# Altium PCB PCB1.PcbDoc
Units mm, origin at the board's own origin, x right, y up, seen from the top; angles counter-clockwise.
Board outline 38.5 x 32.5 mm, 4 copper layers (L1(SIGNAL), L2(GND), L3(GND), L4(SIGNAL)), stack 1.57 mm thick; 35 components, 27 nets, 172 pads, 68 vias.
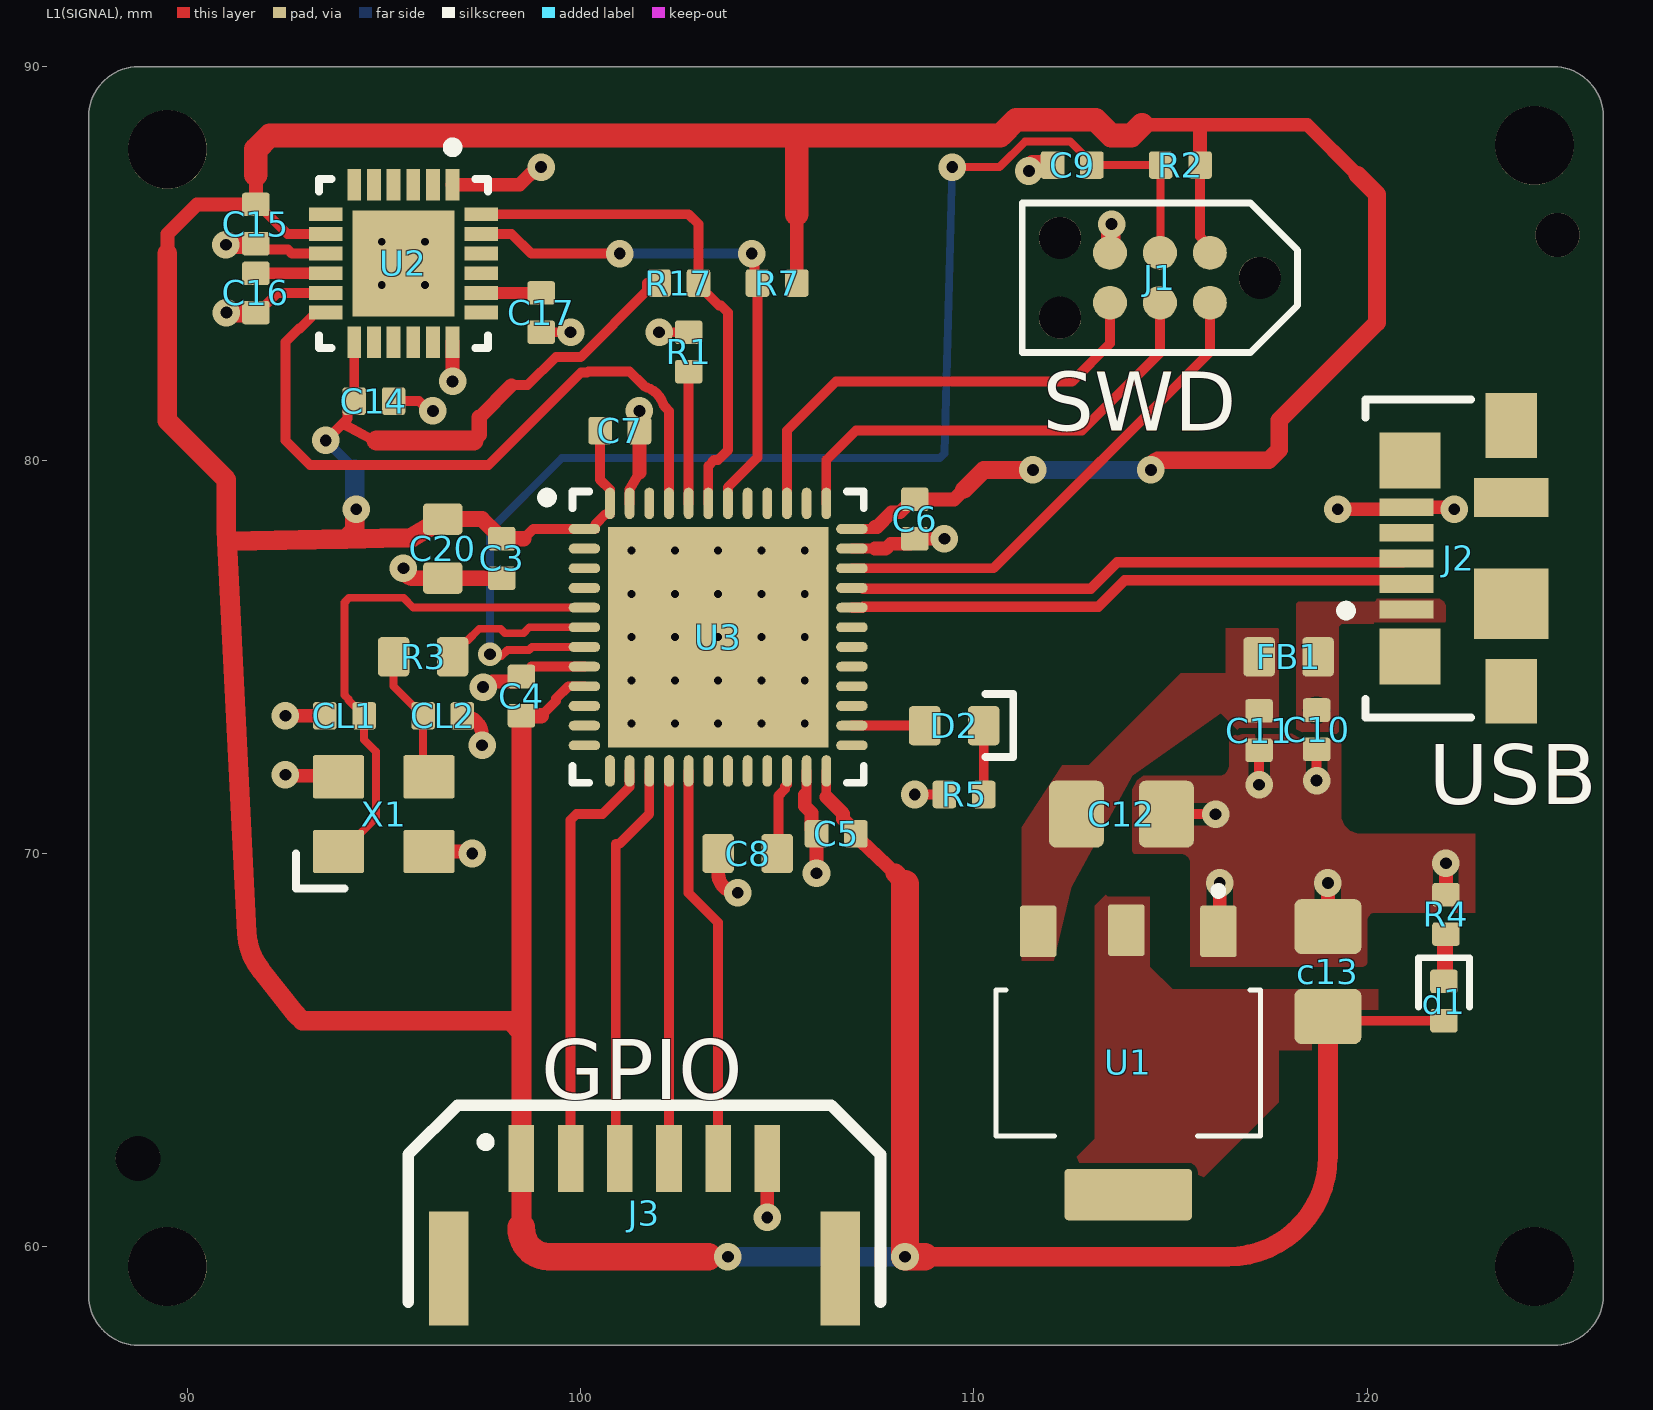
[diagram p0: L1(SIGNAL) view]
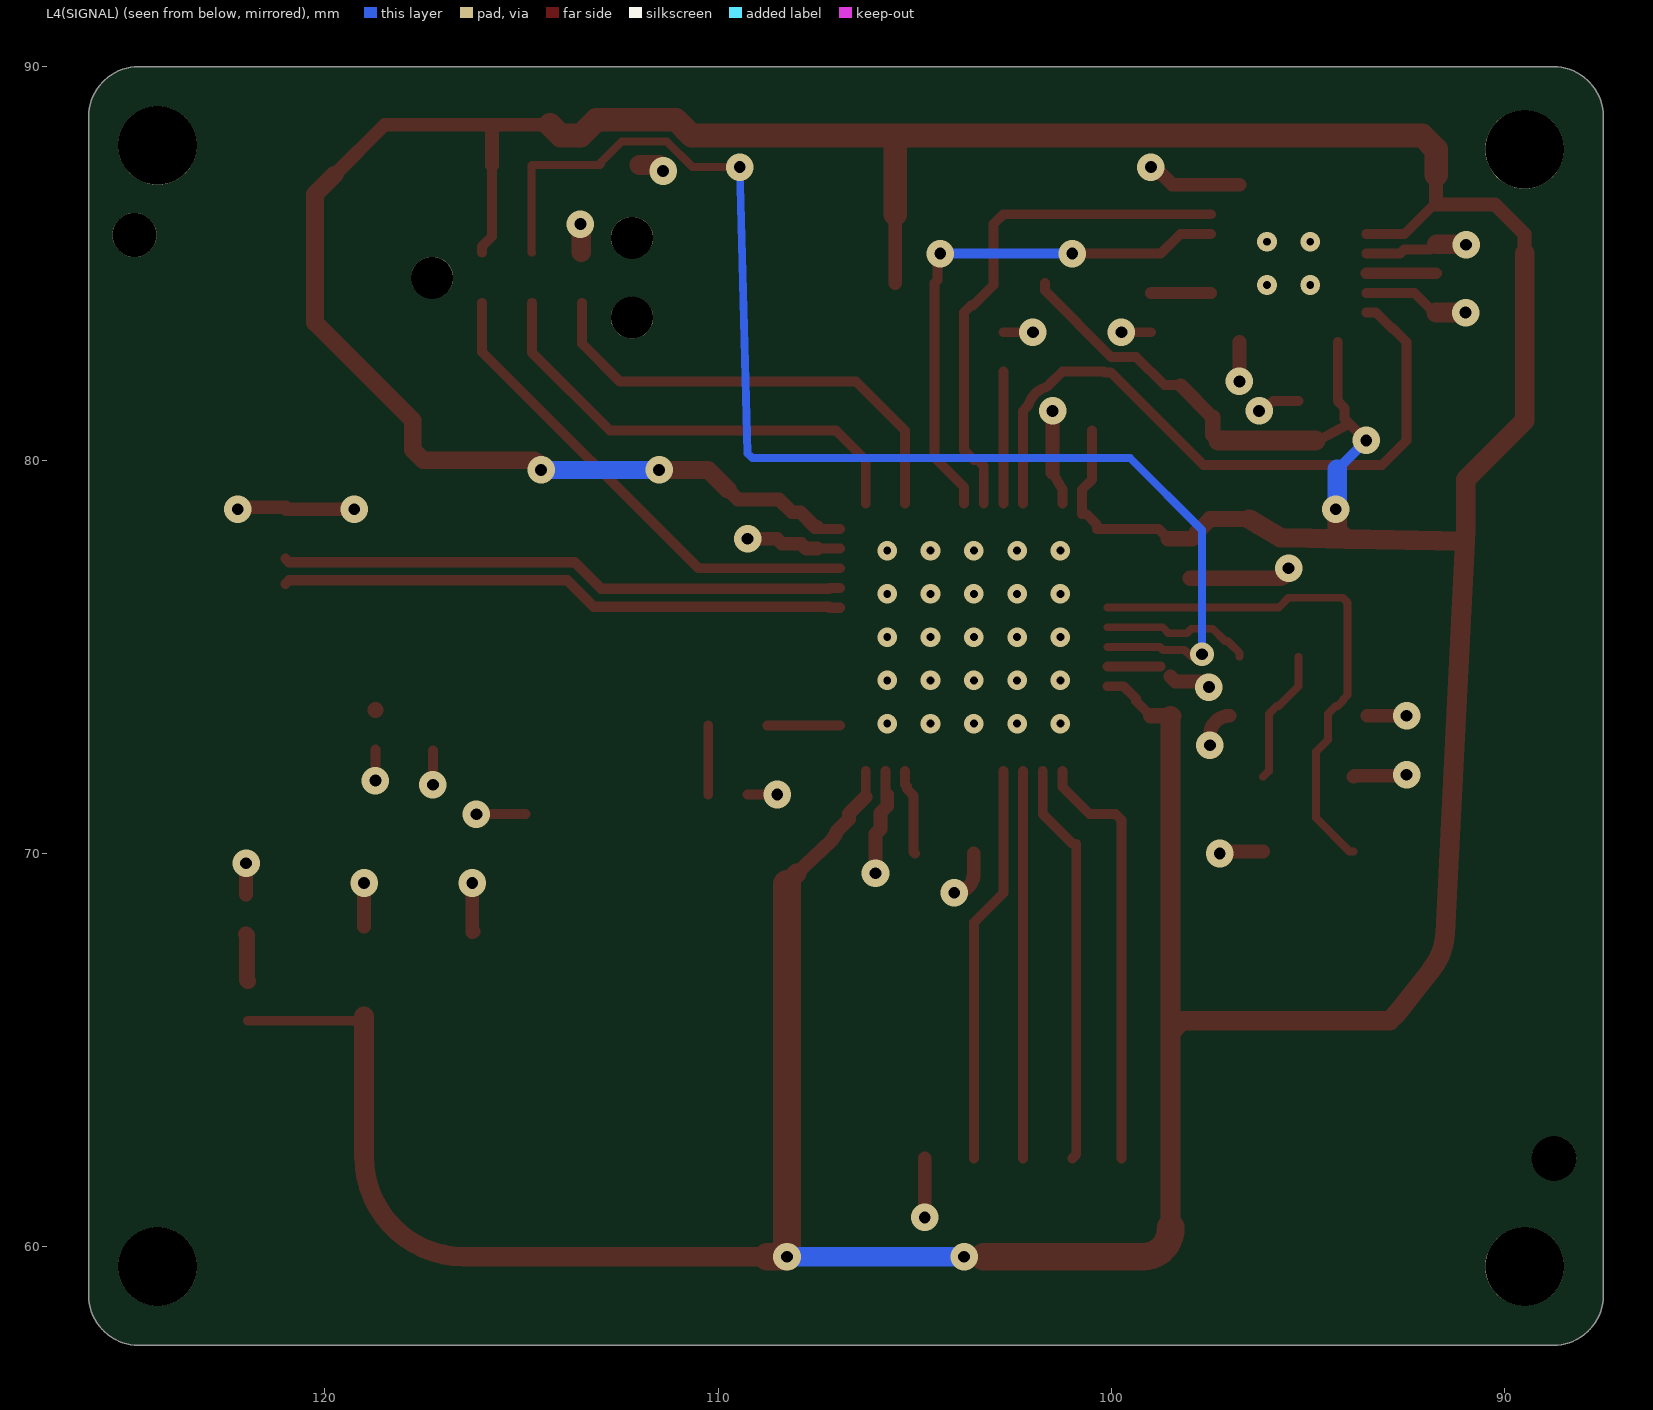
[diagram p1: L4(SIGNAL) view, seen from below]
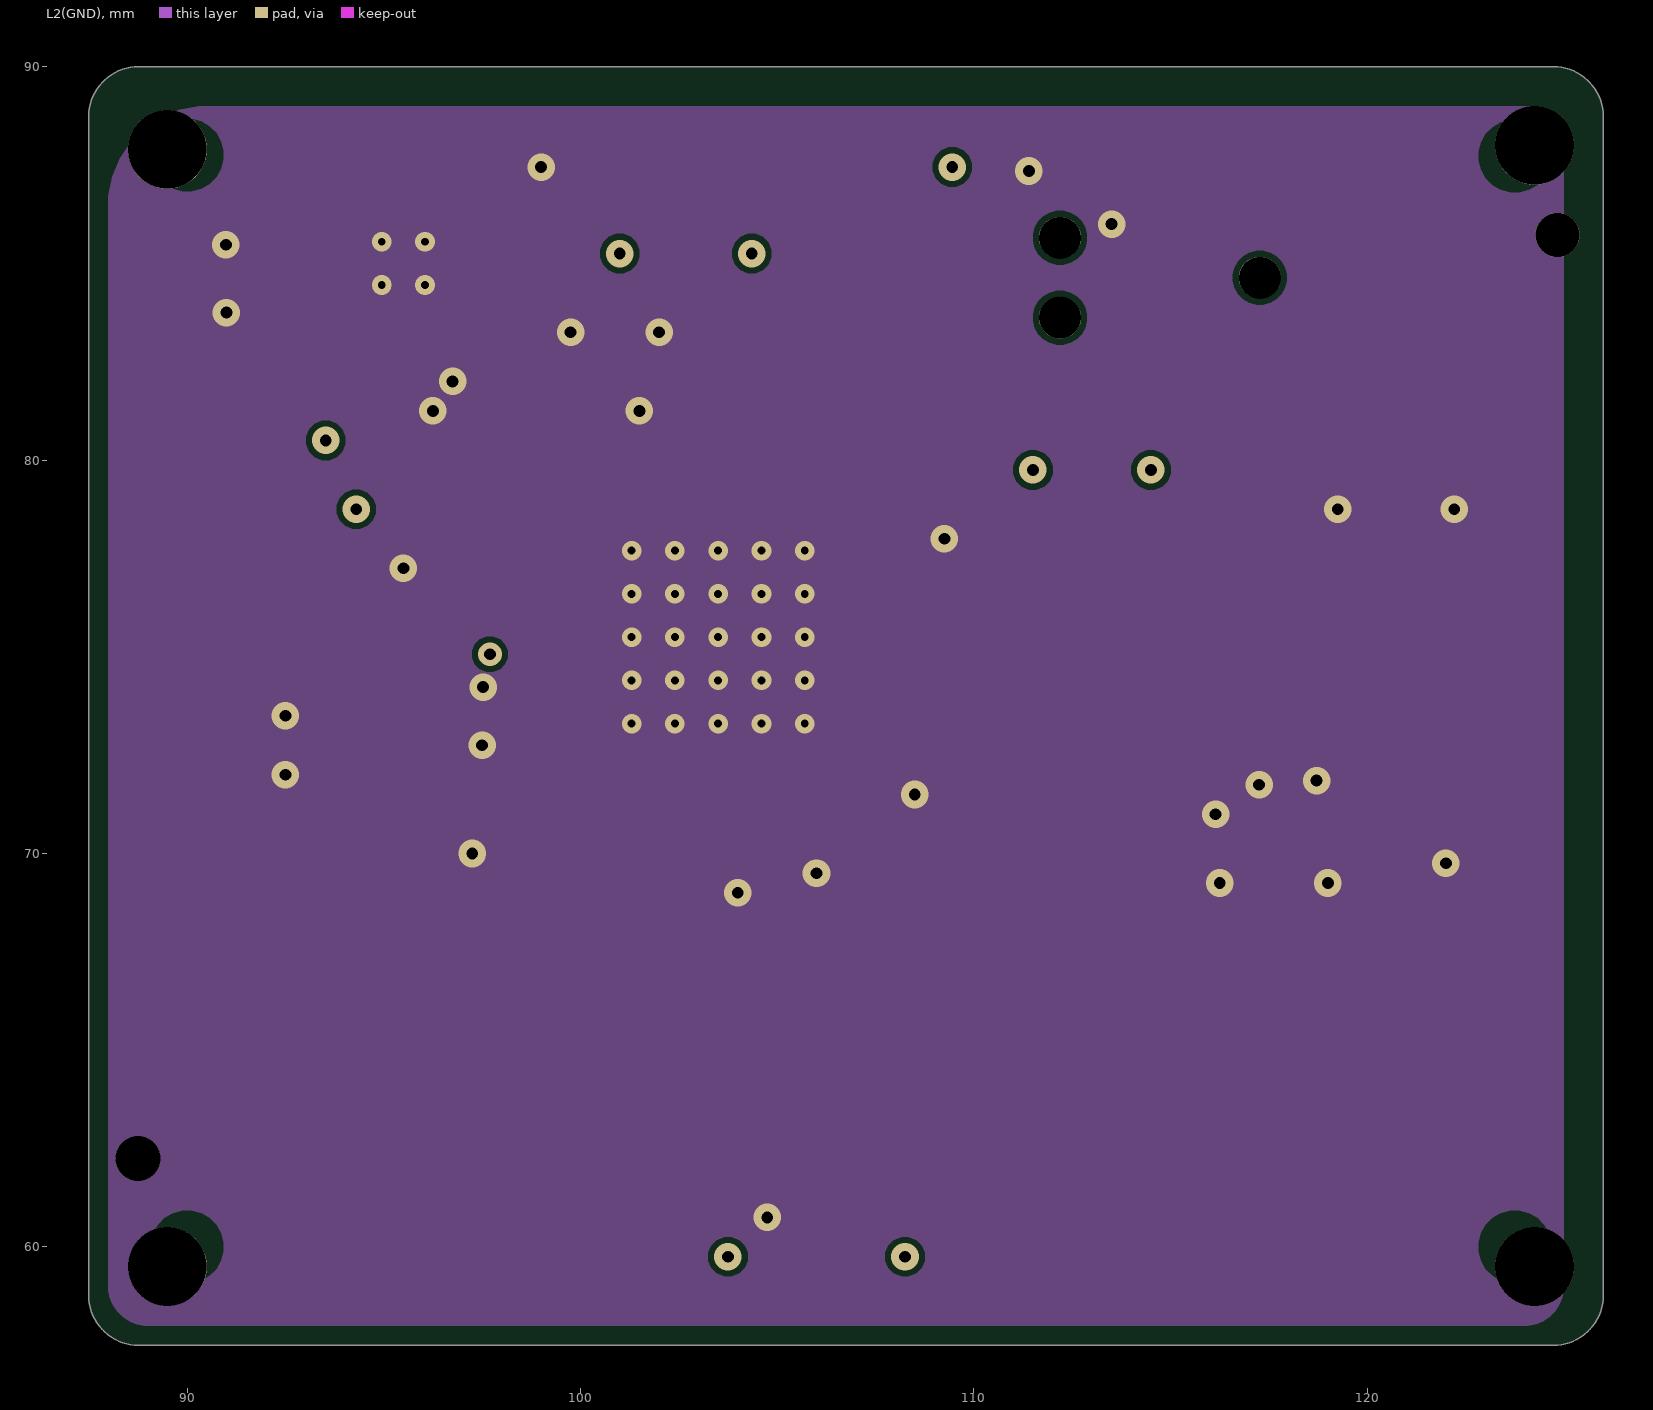
[diagram p2: L2(GND)]
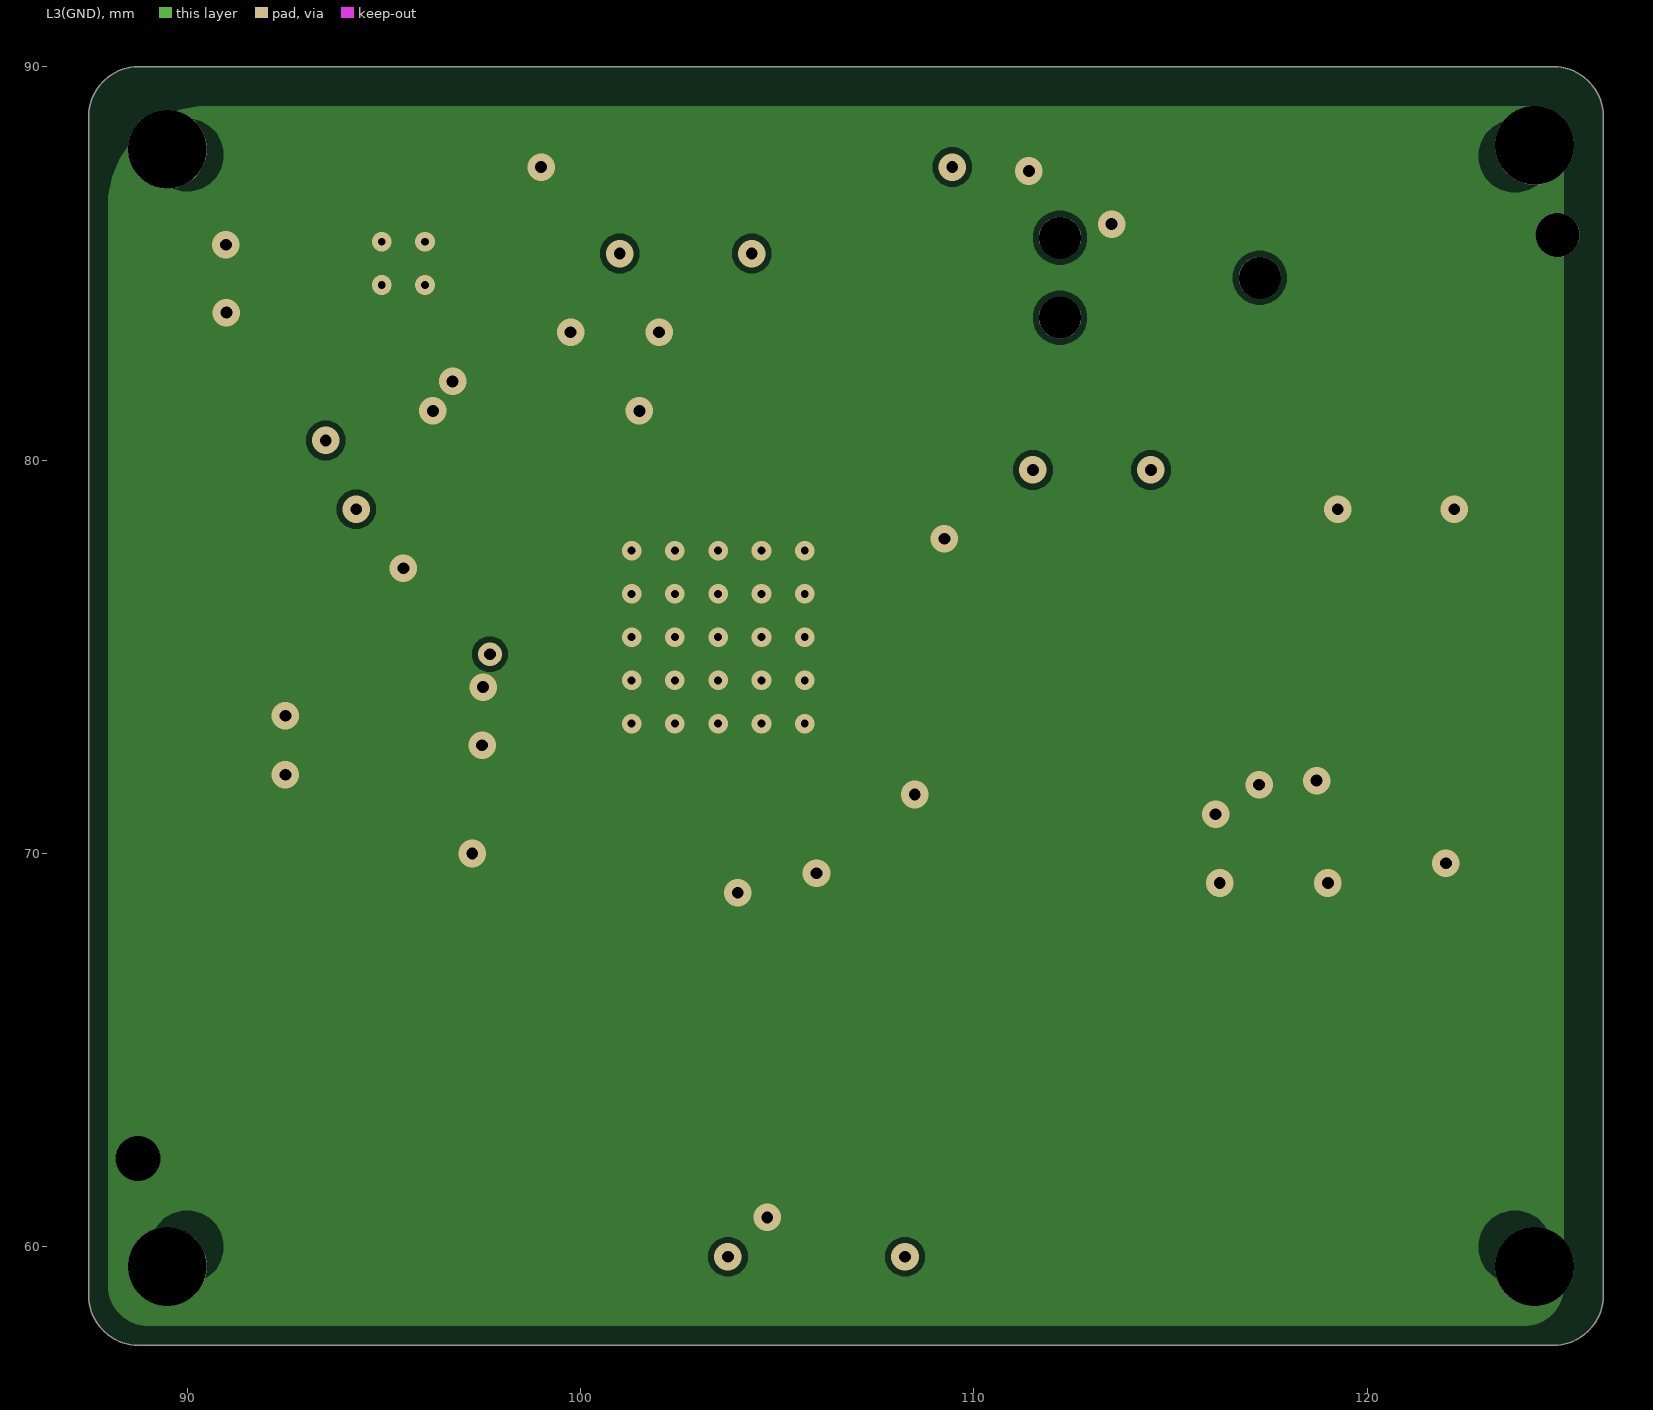
[diagram p3: L3(GND)]
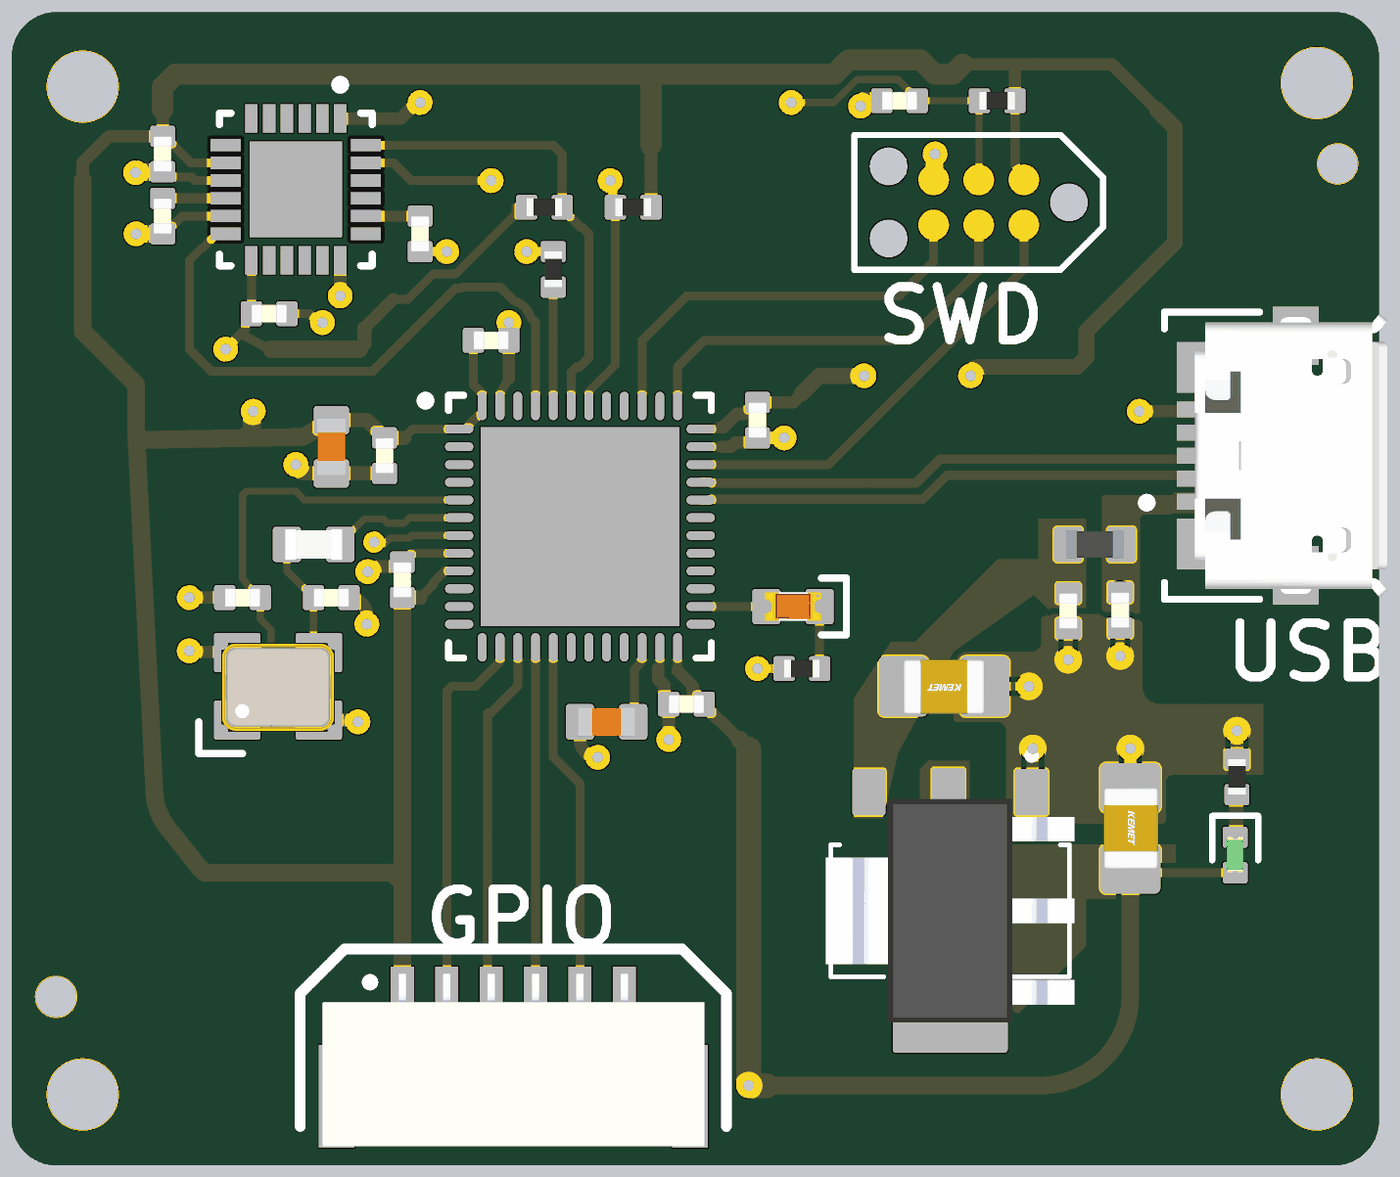
[diagram p4: 3D render of the assembled board from above, using the file's embedded part models]

## Layer stack, top to bottom
Top Solder: solder mask 0.0254, SM-001, Dk 4
L1(SIGNAL): signal copper 0.035
Dielectric 1: prepreg 0.2, PP-017, Dk 4.6
L2(GND): signal copper 0.0175
Dielectric 3: core 1.065, Core-039, Dk 4.6
L3(GND): signal copper 0.0175
Dielectric 5: prepreg 0.2, PP-017, Dk 4.6
L4(SIGNAL): signal copper 0.035
Bottom Solder: solder mask 0.0254, SM-001, Dk 4

## Board outline
87.5,58.77 ccw(c88.77,58.77) 88.77,57.5 124.73,57.5 ccw(c124.73,58.77) 126,58.77 126,88.73 ccw(c124.73,88.73) 124.73,90 88.77,90 ccw(c88.77,88.73) 87.5,88.73

## Design rules (kind name [scope] priority, off if disabled: settings)
Clearance [All] p1: gap=0.15 ignorepadtopadclearanceinfootprint=FALSE
DiffPairsRouting [All] p1: maxlimit=0.254 minlimit=0.2 mostfreqgap=0.25 toplayer_maxgap=0.2 toplayer_prefgap=0.2 toplayer_minwidth=0.261 toplayer_maxwidth=0.261 toplayer_prefwidth=0.261 bottomlayer_maxgap=0.2 bottomlayer_prefgap=0.2 bottomlayer_minwidth=0.261 bottomlayer_maxwidth=0.261 bottomlayer_prefwidth=0.261 impedanceprofiledriven=TRUE impedanceprofileid={D6302A62-F58C-4E55-9A56-6837BD8FFB2D} impedanceprofilevalue=90.000000 maxuncoupledlength=12.7
HoleSize [All] p1: absolutevalues=TRUE maxlimit=6.3 minlimit=0.2 maxpercent=80.000 minpercent=20.000
MinimumSolderMaskSliver [All] p1: minsoldermaskwidth=0.025
PolygonConnect [All] p1: connectstyle=Direct reliefconductorwidth=0.254 reliefentries=4 polygonreliefangle="90 Angle" airgapwidth=0.254
RoutingVias [All] p1: holewidth=0.3 width=0.7 viastyle="Through Hole" minholewidth=0.25 minwidth=0.55 maxholewidth=0.4 maxwidth=0.9
SilkToSolderMaskClearance [IsPad] p1: minsilkscreentomaskgap=0.1 clearancetoexposedcopper=TRUE
SolderMaskExpansion [All] p1: expansion=0.04 istentingtop=FALSE
SupplyNets "Schematic Supply Nets_4" [InNet('GND')] p1: voltage=0.000
SupplyNets "Schematic Supply Nets_3" [InNet('VBUS')] p2: voltage=0.000
SupplyNets "Schematic Supply Nets_2" [InNet('+3V3')] p3: voltage=0.000
SupplyNets "Schematic Supply Nets" [InNet('+5')] p4: voltage=0.000
Width [All] p1: maxlimit=1 minlimit=0.15 preferedwidth=0.3 midlayer1_prefwidth=0.254 midlayer2_prefwidth=0.254 minimp=50.000000 maximp=50.000000 favimp=50.000000
26 further rules are at their usual default settings.

## Classes and differential pairs
differential pair class *DIFF_USB: USB_D
differential pair USB_D: +USB_D_P -USB_D_N

## Components (designator, comment, footprint, x,y, rotation, side; value= is the part's Value field where it differs from the comment)
C3 "100n" CAP_0402 98,77.5 r90 top
C4 "100n" CAP_0402 98.5,74 r270 top
C5 "100n" CAP_0402 106.5,70.5 r0 top
C6 "100n" CAP_0402 108.5,78.5 r90 top
C7 "100n" CAP_0402 101,80.75 r180 top
C8 "2u2" CAP_0603 104.25,70 r0 top
C9 "100n" CAP_0402 112.5,87.5 r0 top
C10 "2u2" CAP_0402 118.712,73.147 r90 top
C11 "2u2" CAP_0402 117.25,73.125 r90 top
C12 "22u" CAP_0805 113.75,71 r180 top
c13 "22u" CAP_0805 119,67 r270 top
C14 "100n" CAP_0402 94.75,81.5 r180 top
C15 "10n" CAP_0402 91.75,86 r90 top
C16 "100n" CAP_0402 91.75,84.25 r90 top
C17 "2n2" CAP_0402 99,83.75 r90 top
C20 "2u2" CAP_0603 96.5,77.75 r90 top
CL1 "10p" CAP_0402 94,73.5 r180 top
CL2 "10p" CAP_0402 96.5,73.5 r0 top
d1 "GREEN" LED_0402_GREEN 121.95,66.25 r90 top
D2 "RED" LED_0603_RED 109.5,73.25 r180 top
FB1 "120R" FB_0603 118,75 r180 top
J1 "TC2030-NL" TC2030-NL-FP 114.73,84.635 r180 top
J2 "473460001" FP-473460001-MFG 123.31,77.5 r90 top
J3 "SM06B-GHS-TB" SM06B-GHS-TB 101.625,60.85 r0 top
R1 "10k" RES_0402 102.75,82.75 r270 top
R2 "10k" RES_0402 115.25,87.5 r0 top
R3 "0R" RES_0603 96,75 r0 top
R4 "1k" RES_0402 122,68.45 r270 top
R5 "1k" RES_0402 109.75,71.5 r180 top
R7 "2k2" RES_0402 105,84.5 r0 top
R17 "2k2" RES_0402 102.5,84.5 r180 top
U1 "AMS1117-3.3" SOT229P700X180-4N 113.925,64.675 r180 top
U2 "MPU-6050" IS-QFN-24_V 95.5,85 r270 top
U3 "STM32F411CEU6" STM-UFQFPN48_L 103.5,75.5 r0 top
X1 "24MHz" XTAL_3225 95,71 r0 top

## Footprints (in the part's own frame and the unit in brackets; to place one, negate y for a bottom-side part, rotate by r counter-clockwise, add the part's x,y. Pads: shape width x height; smd on the part's side, far side on the other; paste and mask are expansions set on the pad)
CAP_0402 [mm]
  rrect25% 0.6x0.7 smd: 1(-0.5,0) 2(0.5,0)
  body extent -0.5,-0.26 0.5,0.26, height 0.37
CAP_0603 [mm]
  rrect25% 0.8x1 smd: 1(-0.75,0) 2(0.75,0)
  body extent -0.8,-0.4 0.8,0.4, height 0.51
CAP_0805 [mm]
  rrect25% 1.4x1.7 smd: 1(-1.143,0) 2(1.143,0)
  body extent -1.15,-0.76 1.15,0.79, height 1.01
FB_0603 [mm]
  rrect25% 0.8x1 smd: 1(-0.75,0) 2(0.75,0)
  body extent -0.8,-0.4 0.8,0.4, height 0.81
FP-473460001-MFG [mm]
  rect 0.45x1.38 smd paste+0 mask+0: 1(-1.3,2.31) 2(-0.65,2.31) 3(0,2.31) 4(0.65,2.31) 5(1.3,2.31)
  rect 1.425x1.55 smd paste+0 mask+0: 6(-2.488,2.225) 7(2.488,2.225)
  rect 1.65x1.3 smd paste+0 mask+0: 8(-3.375,-0.35) 11(3.375,-0.35)
  rect 1.8x1.9 smd paste+0 mask+0: 9(-1.15,-0.35)
  rect 1x1.9 smd paste+0 mask+0: 10(1.55,-0.35)
  silkscreen extent -4.05,0.67 4.05,3.97, body extent -4.3,-2.48 4.3,3.45, height 0.25
IS-QFN-24_V [mm] "QFN, 24-Leads, Body 4x4mm, Pitch 0.5mm, Thermal Pad 2.7x2.6mm"
  rect 0.8x0.35 smd: 1(-2,1.25) 2(-2,0.75) 3(-2,0.25) 4(-2,-0.25) 5(-2,-0.75) 6(-2,-1.25) 13(2,-1.25) 14(2,-0.75) 15(2,-0.25) 16(2,0.25) 17(2,0.75) 18(2,1.25)
  rect 0.35x0.85 smd mask+0.102: 7(-1.25,-1.975) 8(-0.75,-1.975) 9(-0.25,-1.975) 10(0.25,-1.975) 11(0.75,-1.975) 12(1.25,-1.975) 19(1.25,1.975) 20(0.75,1.975) 21(0.25,1.975) 22(-0.25,1.975) 23(-0.75,1.975) 24(-1.25,1.975)
  rect 2.7x2.6 smd: 25(0,0)
  silkscreen extent -3.07,-2.15 2.15,2.15, body extent -2,-2 2,2, height 0.95
LED_0402_GREEN [mm]
  rrect25% 0.6x0.7 smd: A(-0.5,0) K(0.5,0)
  silkscreen extent -0.15,-0.65 1.1,0.65, body extent -0.51,-0.25 0.51,0.25, height 0.45
LED_0603_RED [mm]
  rrect25% 0.8x1 smd: A(0.75,0) K(-0.75,0)
  silkscreen extent -1.5,-0.8 -0.8,0.8, body extent -0.8,-0.4 0.8,0.4, height 0.6
RES_0402 [mm]
  rrect25% 0.6x0.7 smd: 1(-0.5,0) 2(0.5,0)
  body extent -0.5,-0.25 0.5,0.25, height 0.3
RES_0603 [mm]
  rrect25% 0.8x1 smd: 1(-0.75,0) 2(0.75,0)
  body extent -0.8,-0.43 0.8,0.43, height 0.52
SM06B-GHS-TB [mm]
  rect 0.65x1.7 smd: 1(-3.125,1.4) 2(-1.875,1.4) 3(-0.625,1.4) 4(0.625,1.4) 5(1.875,1.4) 6(3.125,1.4)
  rect 1x2.9 smd: ""(-4.975,-1.4) ""(4.975,-1.4)
  silkscreen extent -6,-2.25 6,2.75, body extent -5.38,-2.8 5.38,2.05, height 4.26
SOT229P700X180-4N [mm]
  rrect15% 0.93x1.31 smd: 1(-2.29,-3.345) 2(0.05,-3.375) 3(2.29,-3.345)
  rrect15% 3.24x1.31 smd: 4(0,3.345)
  silkscreen extent -3.36,-4.47 3.36,1.86, body extent -3.5,-3.15 3.5,3.15, height 1.8
STM-UFQFPN48_L [mm] "QFN, 48-Leads, Body 7.1x7.1mm, Pitch 0.5mm, Thermal Pad 5.6x5.6mm, IPC High Density"
  oval 0.8x0.25 smd: 1(-3.4,2.75) 2(-3.4,2.25) 3(-3.4,1.75) 4(-3.4,1.25) 5(-3.4,0.75) 6(-3.4,0.25) 7(-3.4,-0.25) 8(-3.4,-0.75) 9(-3.4,-1.25) 10(-3.4,-1.75) 11(-3.4,-2.25) 12(-3.4,-2.75) 25(3.4,-2.75) 26(3.4,-2.25) 27(3.4,-1.75) 28(3.4,-1.25) 29(3.4,-0.75) 30(3.4,-0.25) 31(3.4,0.25) 32(3.4,0.75) 33(3.4,1.25) 34(3.4,1.75) 35(3.4,2.25) 36(3.4,2.75)
  oval 0.25x0.8 smd: 13(-2.75,-3.4) 14(-2.25,-3.4) 15(-1.75,-3.4) 16(-1.25,-3.4) 17(-0.75,-3.4) 18(-0.25,-3.4) 19(0.25,-3.4) 20(0.75,-3.4) 21(1.25,-3.4) 22(1.75,-3.4) 23(2.25,-3.4) 24(2.75,-3.4) 37(2.75,3.4) 38(2.25,3.4) 39(1.75,3.4) 40(1.25,3.4) 41(0.75,3.4) 42(0.25,3.4) 43(-0.25,3.4) 44(-0.75,3.4) 45(-1.25,3.4) 46(-1.75,3.4) 47(-2.25,3.4) 48(-2.75,3.4)
  rect 5.6x5.6 smd: 49(0,0)
  silkscreen extent -4.47,-3.7 3.7,3.7, body extent -3.55,-3.55 3.55,3.55, height 0.6
TC2030-NL-FP [mil]
  round 33.98 smd paste-16.99: 1(-50,-25) 2(-50,25) 3(0,-25) 4(0,25) 5(50,-25) 6(50,25)
  round 42.01 hole 42.01 unplated: MH(-100,0) MH(100,-40) MH(100,40)
  silkscreen extent -138,-75 138,75
XTAL_3225 [mm]
  rrect10% 1.3x1.1 smd: 1(-1.15,-0.95) 2(1.15,-0.95) 3(1.15,0.95) 4(-1.15,0.95)
  silkscreen extent -2.23,-1.89 -1,-1, body extent -1.6,-1.28 1.6,1.22, height 0.61

## Part data
C3 C4 C5 C6 C7 C9 C10 C11 C14 C15 C16 C17 CL1 CL2: library part CAP_0402, "Capacitor SMD 0402"
C8 C20: library part CAP_0603, "Capacitor SMD 0603"
C12 c13: library part CAP_0805, "Capacitor SMD 0805"
d1: library part LED_0402_GREEN, "LED 0402 GREEN SMD"
D2: library part LED_0603_RED, "LED 0603 RED SMD"
FB1: library part FB_0603, "Ferrite Bead SMD 0603"
J1: "Tag-Connect No-Solder SWD Debug Connector (No Legs) DO NOT PLACE", Manufacturer=Tag-Connect, Manufacturer Part Number=TC2030-NL-FP
J2: library part CMP-2000-05246-2, "CONN RCPT USB2.0 MICRO B SMD R/A", Current Rating=1.8A, Manufacturer=Molex, Package=0, Temperature="-30°C to +85°C", Temperature Range High=+85°C, Temperature Range Low=-30°C, Voltage Rating=30V, Automotive=No, Category=Conn, ComponentLink2Description=Datasheet, ComponentLink2URL=https://www.molex.com/webdocs/datasheets/pdf/en-us/0473460001_IO_CONNECTORS.pdf, Conn Orientation="Right Angle", Contact Material=Gold,Nickel, Device Class L1=Connectors, Device Class L2="USB Connectors", Device Class L3=unset, Digikey Description="CONN RCPT USB2.0 MICRO B SMD R/A", Footprint Url=https://www.molex.com/pdm_docs/sd/473460001_sd.pdf, Height=2.945mm, Is Female=yes, Lead Free=Yes, Manufacturer Part Number=473460001, Number Of Contacts=5, Octopart=https://octopart.com/47346-0001-molex-7164928, Pitch=0.65mm, RoHS=TRUE, Shielding=true, Usb Standard="USB 2.0"
J3: "Header Connector 6 Position 1.25MM Pitch SMD Horizontal JST GH", Manufacturer=JST, Manufacturer Part Number=SM06B-GHS-TB
R1 R2 R4 R5 R7 R17: library part RES_0402, "Resistor SMD 0402"
R3: library part RES_0603, "Resistor SMD 0603"
U1: "Linear Voltage Regulator IC Positive Fixed 1 Output 1A SOT-223-3L", Package="SOT-223-3L UMW", Check_prices=https://www.snapeda.com/parts/AMS1117-3.3/UMW/view-part/?ref=eda, MF=UMW, MP=AMS1117-3.3, SnapEDA_Link=https://www.snapeda.com/parts/AMS1117-3.3/UMW/view-part/?ref=snap
U2: library part CMP-1753-00002-2, "3-Axis Gyroscope, Accelerometer and a Digital Motion Processor(TM) (DMP), 2.375 to 3.46 V, -40 to 85 degC, 24-Pin QFN, RoHS, Tape and Reel", Manufacturer=InvenSense, Standard Package=5,000, Category=Sensors,Transducers, Datasheet URL=http://datasheet.octopart.com/MPU-6050-InvenSense-datasheet-14421344.pdf, Datasheet Version="Rev. 3.3, 05/2012", Dynamic Catalog=MPU-6000™Series, Family=Multifunction, Featured Product=MPU-60506-Axis,IntegratedI²CSolution, Manufacturer URL=http://www.invensense.com/, Online Catalog=MPU-6000™Series, Other Names="1428-1007-2 / MPU6050", Output Type=Digital, Sensor Type=MotionTracking, Unit PriceUSD=Digital
U3: library part CMP-0243-00165-1, "ARM Cortex-M4 32-bit MCU+FPU, 512 KB Flash, 128 KB RAM, 36 I/Os, 48-Pin UFQFPN, -40 to 85 degC, Tray", I/Os (High Current)=36, Operating Frequency(F) (Processor speed) (MHz)=100, Package Description=UFQFPN48, Package Reference="48-Pin Ultra Thin Fine Pitch Quad Flat No-Lead, 7 x 7 x 0.6 mm Body, 0.5 mm Pitch, Exposed Pad", Supply Voltage(Vcc) min (V)=1.7, ComponentLink1Description="Manufacturer URL", ComponentLink1URL=http://www.st.com/, ComponentLink2Description=Datasheet, ComponentLink2URL=http://www.st.com/st-web-ui/static/active/en/resource/technical/document/datasheet/DM00115249.pdf, Core="ARM Cortex-M4", DatasheetVersion="Rev. 6", FLASH Size (Prog) (kB)=512, Internal RAM Size (kB)=128, Mounting Technology="Surface Mount", Packing=Tray
X1: library part TSX-3225_24.0000MF15X-AC, "Crystal SMD 24MHz 10PPM 7pF 3225", Manufacturer=Epson, Manufacturer Part Number="TSX-3225 24.0000MF15X-AC"

## Free pads (board coordinates)
  round 2 hole 2: 15(89.5,59.5) 15(89.5,87.899) 15(124.25,59.5) 15(124.25,88)
  round 1.125 hole 1.125: 15(124.835,85.721)
  round 1.125 hole 1.15: TH(88.75,62.25)

## Via types
v1: diameter 0.7, hole 0.3, L1(SIGNAL) to L4(SIGNAL), 38 vias
v2: diameter 0.5, hole 0.2, L1(SIGNAL) to L4(SIGNAL), 29 vias
v3: diameter 0.6, hole 0.3, L1(SIGNAL) to L4(SIGNAL), 1 vias

## Nets (pads, with @x,y where several pads share a name; then routed paths per layer and width w, separated by ;. In a path a pad name is that pad's centre, name@x,y a point inside that pad or via, vN(x,y) a via of type N, cw(c..) or ccw(c..) an arc to the next point about the centre after c; other vN are vias at no path point)
+3V3: C3.2 C4.2 C5.2 C6.2 C7.2 c13.2 C14.2 C15.2 C20.2 d1.A J1.1 J3.1 R2.2 R7.2 R17.2 U1.2 U2.8 U2.13 U3.1 U3.9 U3.24 U3.36 U3.48 | length 174.3
  L1(SIGNAL) w0.25: C15.2@91.8,86.5 92.55,85.75 U2.8 ; v1(93.525,80.5) 93.957,80.932 ; U2.13 C14.2 94.075,81.325 94.075,81.05 93.957,80.932 ; 94.694,80.53 93.957,80.932 ; 94.695,80.53 ccw(c94.814,80.75) 94.814,80.5 ; 97.284,80.5 97.431,80.646 ; 98.25,81.905 98.655,81.905 99.375,82.625 100.009,82.625 101.693,84.309 101.693,84.5 ; 98.55,78 98.8,78.25 U3.1 100.375,78.25 100.375,78.364 100.636,78.625 100.75,78.625 U3.48 100.75,79.25 100.5,79.5 C7.2 ; 99,73.5 99.375,73.875 99.375,73.936 99.689,74.25 U3.9 ; 106.25,71.438 U3.24 ; U3.36 107.435,78.25 107.485,78.3 ; R2.2 115.75,85.686 116,85.436 J1.1 ; c13.2 119.107,65.75 d1.A
  L1(SIGNAL) w0.35: 89.5,85.25 89.5,85.75 90.25,86.5 C15.2 91.75,87.25 ; 97.431,81.086 98.25,81.905 ; R7.2 105.5,86.25 ; 106.25,71.438 106.675,71.013 106.675,70.875 C5.2@107,70.55 ; C5.2 107.125,70.325 108,69.5 ; 107.485,78.3 107.535,78.3 107.91,78.675 108.125,78.675 108.45,79 C6.2 109.5,79 109.75,79.25 ; 114.274,88.524 115.75,88.524 ; R2.2 115.75,88.524 ; 119.75,87.25 118.476,88.524 115.75,88.524
  L1(SIGNAL) w0.4: C20.2 97.5,78.5 97.85,78.15 97.85,78.1 97.95,78 C3.2 98.55,78 ; 97.431,80.646 97.431,81.086 ; C4.2@98.422,73.5 99,73.5
  L1(SIGNAL) w0.45: 109.75,79.25 110.25,79.75 v1(111.5,79.75) ; v1(114.5,79.75) cw(c114.75,79.75) 114.75,80 117.499,80 117.763,80.264 117.763,81.012 120.25,83.5 120.25,86.75 119.75,87.25
  L1(SIGNAL) w0.5: 89.5,85.25 89.5,81 91,79.5 91,78.25 91.016,77.938 ; v1(94.3,78.75) 94.262,78.712 94.262,78.215 94.042,77.996 ; 94.814,80.5 97.284,80.5 ; C20.2 96.25,78.35 95.713,78.028 94.948,78.013 94.5,78.005 94.249,78 94.042,77.996 ; 98.5,60.5 98.5,61.65 J3.1 98.5,65.457 ; C4.2 98.5,73.45 98.5,65.457 ; 103.25,59.75 v1(103.75,59.75) ; 108,69.5 108.25,69.225 ; 108.75,59.75 116.46,59.75 ccw(c116.46,62.29) 119,62.29 c13.2 ; 91.016,77.938 94.042,77.996 ; 91.016,77.938 91.52,67.973 ccw(c93.154,68.057) 91.873,67.039 92.765,65.917 92.785,65.896 92.931,65.75 98.207,65.75 98.5,65.457
  L1(SIGNAL) w0.6: 91.75,87.25 91.75,87.899 92.101,88.25 105.5,88.25 ; 105.5,86.25 105.5,88.25 ; 114.274,88.524 114,88.25 113.492,88.25 113.092,88.65 111.075,88.65 110.675,88.25 105.5,88.25
  L1(SIGNAL) w0.7: 98.5,60.5 ccw(c99.198,60.45) 99.198,59.75 103.25,59.75 ; 108.25,69.225 v1(108.25,59.75) 108.75,59.75
  L4(SIGNAL) w0.25: v1(93.525,80.5) 94.262,79.763
  L4(SIGNAL) w0.45: v1(111.5,79.75) v1(114.5,79.75)
  L4(SIGNAL) w0.5: 94.262,79.763 94.262,78.788 v1(94.3,78.75) ; v1(103.75,59.75) v1(108.25,59.75)
+5: C11.2 C12.2 FB1.2 U1.3
GND: C3.1 C4.1 C5.1 C6.1 C7.1 C8.1 C9.1 C10.1 C11.1 C12.1 c13.1 C14.1 C15.1 C16.1 C17.1 C20.1 CL1.2 CL2.2 J1.5 J2.5 J3.6 pad.TH R1.1 R4.1 R5.2 U1.1 U2.1 U2.9 U2.11 U2.18 U2.25 U3.8 U3.23 U3.35 U3.47 U3.49 X1.2 X1.4 | length 42.8
  L1(SIGNAL) w0.25: v1(90.989,85.474) v1@91.002,85.487 ; C15.1@91.737,85.487 C15.1 91.9,85.35 92.563,85.35 92.663,85.25 U2.9 ; C16.1@91.8,83.75 92.3,84.25 U2.11 ; C14.1 95.896,81.5 96.146,81.25 v1(96.25,81.25) ; C4.1@98.75,74.75 U3.8 ; C17.1 v1(99.75,83.25) ; U3.47 101.25,79.258 101.5,79.677 ; v1(102,83.25) R1.1 ; 105.7,71.49 105.75,71.54 U3.23 ; U3.35 107.488,77.75 ; v1(108.5,71.5) R5.2 ; v1(111.401,87.349) 111.401,87.476 111.425,87.5 v1@111.5,87.5 ; J1.5 J1.5@113.48,85.29 ; C12.1 v1(116.143,71) ; v1(117.25,71.75) C11.1 ; v1(118.712,71.853) C10.1
  L1(SIGNAL) w0.35: v1(92.5,72) 92.525,71.975 93.825,71.975 X1.4 ; v1(92.5,73.5) CL1.2 ; X1.2 97.2,70.05 cw(c97.2,70) v1(97.25,70) ; v1(96.75,82) U2.18 ; U2.1 98.455,87 98.905,87.45 v1(99,87.45) ; CL2.2 cw(c97,73) 97.5,73 v1(97.5,72.75) ; v1(97.524,74.232) 97.618,74.232 97.762,74.375 98.375,74.375 C4.1 ; 101.5,79.677 C7.1 v1(101.5,81.25) ; C8.1 103.5,69.5 ccw(c104,69.5) v1(104,69) ; v1(104.75,60.75) J3.6 ; 105.7,71.49 105.7,71.21 105.875,71.035 105.875,70.625 C5.1 v1(106,69.5) ; 107.488,77.75 107.763,77.75 107.888,77.875 108.375,77.875 C6.1 v1(109.25,78) ; U1.1 116.23,68.02 cw(c116.23,68) 116.25,68 v1(116.25,69.25) ; c13.1 v1(119,69.25) ; v1(119.25,78.75) 120.95,78.75 ccw(c120.95,78.8) J2.5 122.2,78.8 cw(c122.2,78.75) 122.25,78.75 v1(122.21,78.75) ; R4.1 v1(122,69.75)
  L1(SIGNAL) w0.4: v1(95.5,77.25) ccw(c95.75,77.25) 95.75,77 C20.1 C3.1
  L1(SIGNAL) w0.5: v1(91,83.75) C16.1 ; v1@91.002,85.487 C15.1@91.737,85.487 ; v1@111.5,87.5 C9.1 ; J1.5@113.48,85.29 113.48,85.98 v1(113.5,86)
  other v2: 101.3,73.3 102.4,73.3 103.5,73.3 104.6,73.3 105.7,73.3 101.3,74.4 102.4,74.4 103.5,74.4 104.6,74.4 105.7,74.4 101.3,75.5 102.4,75.5 103.5,75.5 104.6,75.5 105.7,75.5 101.3,76.6 102.4,76.6 103.5,76.6 104.6,76.6 105.7,76.6 101.3,77.7 102.4,77.7 103.5,77.7 104.6,77.7 105.7,77.7 94.95,84.45 96.05,84.45 94.95,85.55 96.05,85.55
IMU_CPOUT: C17.2 U2.20 | length 1.5
  L1(SIGNAL) w0.3: U2.20 C17.2
IMU_INT: U2.12 U3.45 | length 17.6
  L1(SIGNAL) w0.25: U2.12 93.275,83.75 92.871,83.346 92.846,83.346 92.5,83 92.5,80.5 93.125,79.875 97.664,79.875 100.014,82.225 100.175,82.225 100.2,82.25 101.25,82.25 101.595,81.905 ; 101.596,81.904 ccw(c101.772,82.082) 101.693,81.844 cw(c101.5,81.25) 102.094,81.444 ccw(c102.332,81.522) 102.154,81.346 ; 102.155,81.345 102.25,81.25 U3.45
IMU_REGOUT: C16.2 U2.10 | length 1.8
  L1(SIGNAL) w0.3: C16.2 U2.10
IMU_SCL: R7.1 U2.23 U3.42 | length 13.8
  L1(SIGNAL) w0.25: U2.23 98.25,85.75 98.75,85.25 v1(101,85.25) ; U3.42 103.75,79.311 104.5,80.061 R7.1 104.427,84.573 104.427,85.177 v1(104.354,85.25)
  L4(SIGNAL) w0.25: v1(101,85.25) v1(104.354,85.25)
IMU_SDA: R17.1 U2.24 U3.43 | length 13.3
  L1(SIGNAL) w0.25: U2.24 102.75,86.25 103,86 R17.1 ; R17.1@103,84.45 103.523,83.927 103.573,83.927 103.75,83.75 103.75,80.25 103.5,80 103.396,80 103.25,79.854 U3.43
"LED PWR K": d1.K R4.2 | length 1.2
  L1(SIGNAL) w0.4: d1.K 121.975,66.775 121.975,67.925 R4.2
"MCU BOOT0": R1.2 U3.44 | length 3.3
  L1(SIGNAL) w0.25: U3.44 102.75,81.5 R1.2
"MCU LED A": D2.A U3.26 | length 1.8
  L1(SIGNAL) w0.25: U3.26 D2.A
"MCU NRST": C9.2 J1.3 R2.1 U3.7 | length 33.3
  L1(SIGNAL) w0.2: v3(97.7,75.064) 97.749,75.015 97.985,75.015 98.145,75.175 98.692,75.175 98.767,75.25 U3.7 ; v1(109.45,87.45) 110.653,87.45 111.303,88.1 112.45,88.1 112.975,87.575 C9.2@112.975,87.525 ; C9.2 114.73,87.5 114.74,87.49 114.74,85.28 J1.3
  L4(SIGNAL) w0.2: v3(97.7,75.064) 97.7,78.225 99.525,80.05 109.133,80.05 109.194,80.111 109.25,80.167 v1(109.45,87.45)
"MCU OSC IN": CL1.1 U3.5 X1.1 | length 13.4
  L1(SIGNAL) w0.2: X1.1 93.95,70.05 94.8,70.9 94.8,72.592 94.5,72.892 94.5,73.55 94.3,73.75 94.25,73.75 94.1,73.9 94.1,73.93 94,74.03 94,76.383 94.117,76.5 95.5,76.5 95.75,76.25 U3.5
"MCU OSC OUT": R3.2 U3.6 | length 3.8
  L1(SIGNAL) w0.2: R3.2 96.75,75.1 97.05,75.4 97.117,75.4 97.431,75.714 97.969,75.714 98.083,75.6 98.551,75.6 98.701,75.75 U3.6
"MCU SWCLK": J1.4 U3.37 | length 12
  L1(SIGNAL) w0.25: U3.37 106.25,80 107,80.75 112.75,80.75 114.73,82.73 J1.4
"MCU SWDIO": J1.2 U3.34 | length 12.6
  L1(SIGNAL) w0.25: U3.34 110.5,77.25 116,82.75 J1.2
"MCU SWO": J1.6 U3.39 | length 12
  L1(SIGNAL) w0.25: U3.39 105.25,80.75 106.5,82 112.5,82 113.46,82.96 J1.6
"MCU VCAP1": C8.2 U3.22 | length 2.2
  L1(SIGNAL) w0.25: C8.2 105.031,70.031 105.031,71.469 105.2,71.639 105.2,71.7 105.25,71.75 U3.22
MCU_PA4: J3.2 U3.14 | length 10.9
  L1(SIGNAL) w0.25: J3.2 99.75,70.854 99.896,71 100.561,71 101.25,71.689 U3.14
MCU_PA5: J3.3 U3.15 | length 10.3
  L1(SIGNAL) w0.25: J3.3 100.896,62.354 100.896,70.25 101,70.25 101.75,71 U3.15
MCU_PA6: J3.4 U3.16 | length 9.8
  L1(SIGNAL) w0.25: J3.4 102.25,71.825 U3.16
MCU_PA7: J3.5 U3.17 | length 10.2
  L1(SIGNAL) w0.25: U3.17 102.75,69 103.5,68.25 J3.5
NetD2_K: D2.K R5.1 | length 1.8
  L1(SIGNAL) w0.25: R5.1 D2.K
USB_D_N: J2.2 U3.32 | length 14.4
  L1(SIGNAL) w0.261: U3.32 107.164,76.25 107.184,76.269 113.16,76.269 113.835,76.944 120.905,76.944 J2.2
USB_D_P: J2.3 U3.33 | length 14.4
  L1(SIGNAL) w0.261: U3.33 107.164,76.75 107.184,76.73 112.969,76.73 113.644,77.405 120.905,77.405 J2.3
VBUS: C10.2 FB1.1 J2.1 | length 0
"XTAL in": CL2.1 R3.1 X1.3 | length 3.5
  L1(SIGNAL) w0.2: R3.1 95.25,74.25 95.75,73.75 95.8,73.75 96,73.55 CL2.1 96,72.1 X1.3
pads on no net: J1.MH J2.4 J2.6 J2.7 J2.8 J2.9 J2.10 J2.11 J3. U1.4 U2.2 U2.3 U2.4 U2.5 U2.6 U2.7 U2.14 U2.15 U2.16 U2.17 U2.19 U2.21 U2.22 U3.2 U3.3 U3.4 U3.10 U3.11 U3.12 U3.13 U3.18 U3.19 U3.20 U3.21 U3.25 U3.27 U3.28 U3.29 U3.30 U3.31 U3.38 U3.40 U3.41 U3.46

## Polygon pours and split planes (outlines as drawn)
GND on L1(SIGNAL) "GND_L01_P010" (solid, pour order 10): 116.49,73.043 119.428,73.043 ccw(c119.428,72.951) 119.335,72.951 119.335,71 ccw(c119.835,71) 119.835,70.5 122.75,70.5 122.75,68.5 120.2,68.5 ccw(c120.2,68.3) 120,68.3 120,67.25 cw(c119.875,67.25) 119.875,67.125 115.5,67.125 115.5,69.75 ccw(c115.25,69.75) 115.25,70 114.093,70 cw(c114.093,70.068) 114.025,70.068 114.025,71.75 cw(c114.25,71.75) 114.25,71.975 116.23,71.975 ccw(c116.23,72.235) 116.49,72.235
VBUS on L1(SIGNAL) "VBUS_L01_P008" (solid, pour order 8): 118.25,73.2 118.25,75.931 cw(c118.713,75.931) 118.713,76.393 120.143,76.393 ccw(c120.143,76.5) 120.25,76.5 121.75,76.5 cw(c121.75,76.25) 122,76.25 122,75.918 cw(c121.925,75.918) 121.925,75.843 119.35,75.843 ccw(c119.35,75.768) 119.275,75.768 119.275,73.093
VBUS on L1(SIGNAL) "VBUS_L01_P001" (solid, pour order 1): 121.675,76.393 118.25,76.393 118.2,76.343 118.2,73.043 119.225,73.043 119.275,73.093 119.275,75.768 119.425,75.918 121.675,75.918
+3V3 on L1(SIGNAL) "+3V3_L01_P002" (solid, pour order 2): 112.175,60.65 112.2,60.625 115.8,60.625 115.8,61.725 117.75,63.675 117.75,65 120.125,65 120.275,65.15 120.275,66.55 115.05,66.55 114.475,67.125 114.475,68.9 113.4,68.9 113.35,68.95 113.075,68.675 113.075,62.75 112.525,62.2 112.175,62.2
+5 on L1(SIGNAL) "+5V" (solid, pour order 0): 116.4,74.587 115.262,74.587 112.923,72.248 112.25,72.248 111.214,70.664 111.214,67.275 112.025,67.275 112.471,69.148 114.025,71.975 116.28,73.57 116.7,73.15 116.75,73.2 117.75,73.2 117.75,75.7 117.775,75.725 116.4,75.725
GND on L2(GND) "GND_L02_P005" (solid, pour order 5): 125,88 ccw(c124,88) 124,89 90.54,89 ccw(c90.54,86.46) 88,86.46 88,59 ccw(c89,59) 89,58 124,58 ccw(c124,59) 125,59 125,87
GND on L3(GND) "GND_L03_P007" (solid, pour order 7): 125,88 ccw(c124,88) 124,89 90.54,89 ccw(c90.54,86.46) 88,86.46 88,59 ccw(c89,59) 89,58 124,58 ccw(c124,59) 125,59 125,87

## Silkscreen, mask and mechanical layers (free items; w line width, h text height)
Top Overlay:
  text "SWD" at 111.75,80.75 h1.5
  text "USB" at 121.557,71.254 h1.52
  text "GPIO" at 99.004,63.754 h1.52
Mechanical 1:
  the board outline again, w0.254

## Text inside footprints (layer, text, board x,y; h text height)
d1: Mechanical 13 "+" at 121.442,64.367 h0.5 r90
D2: Mechanical 13 "+" at 108.183,72.642 h0.5 r180